# EAGLE board Design (EAGLE 9.3.1)
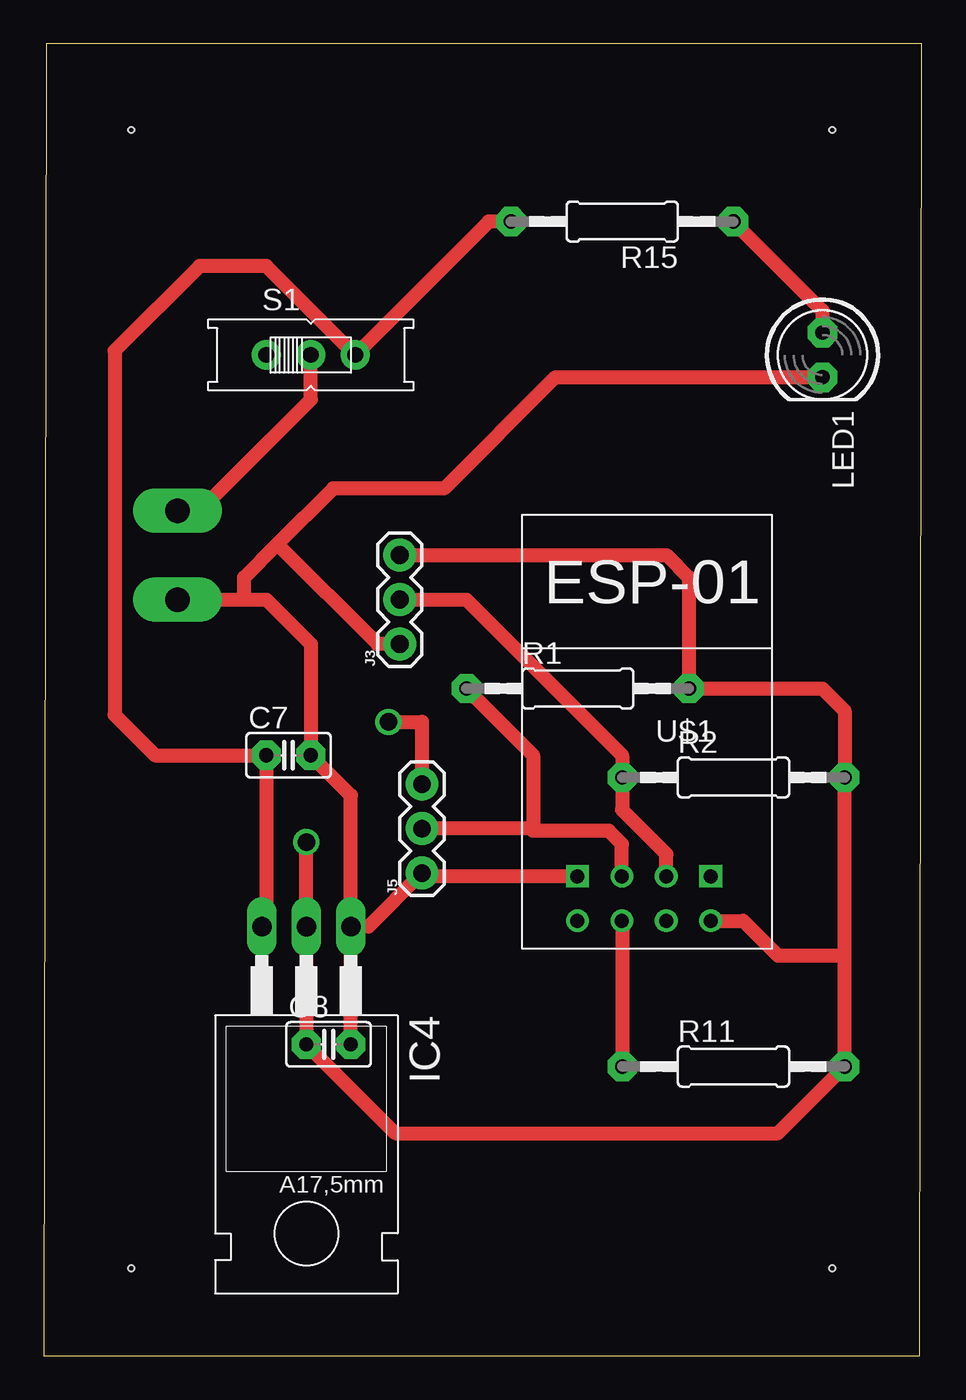
[diagram p0: board, top side]
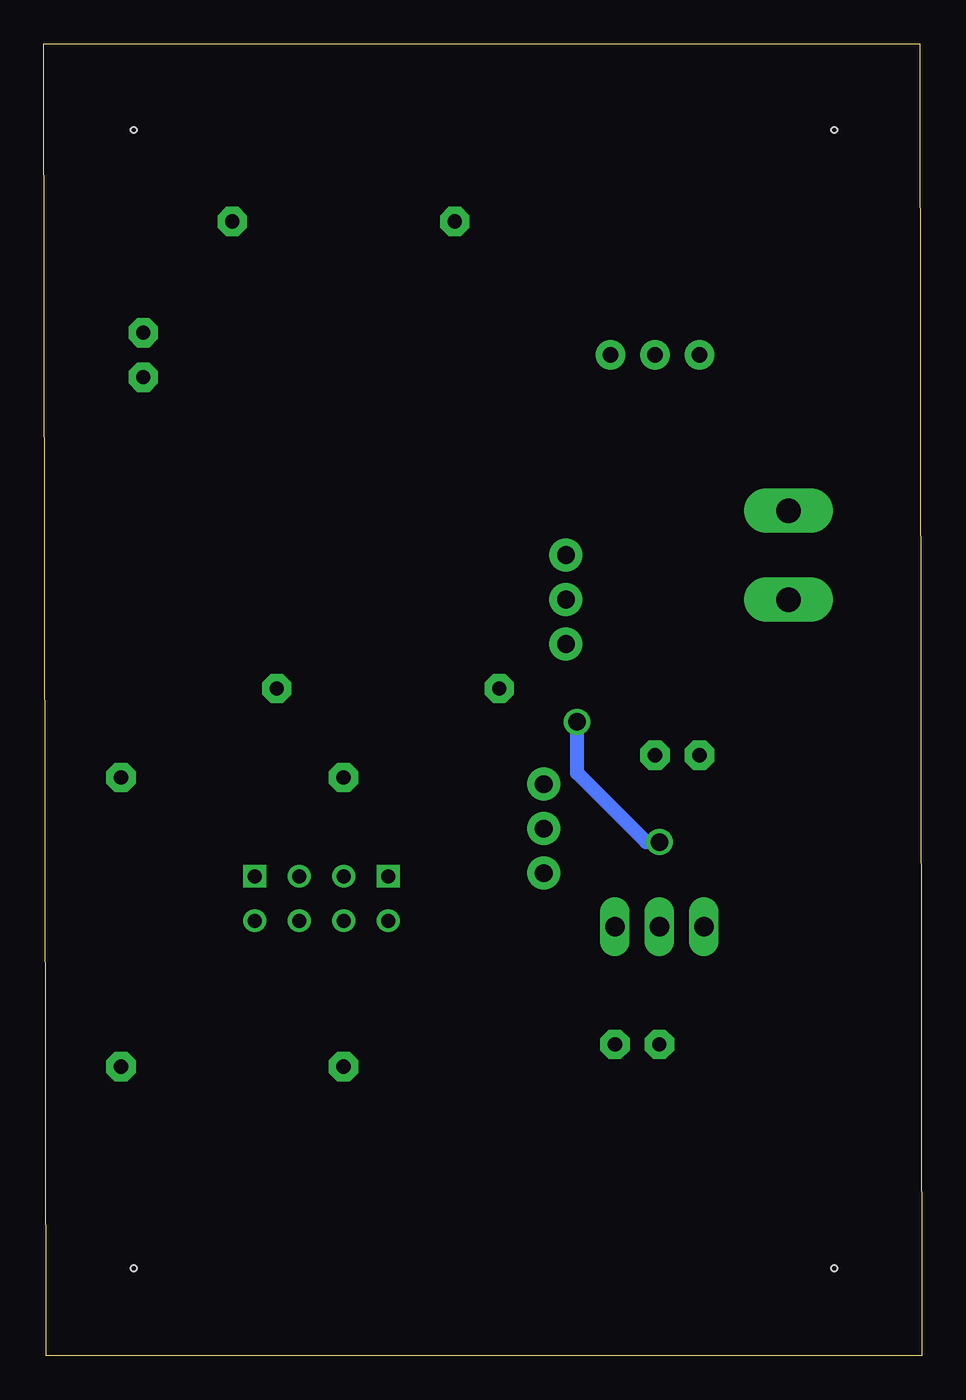
[diagram p1: board, bottom side, seen from below]

Size 50.13 x 74.92 mm. Coordinates in mm from the lower left corner, seen from the top.
Outline: 0,0 50,0 50.13,74.92 0.13,74.92 0,0
Copper layers (1*16): Top 0.035mm / dielectric 1.5mm / Bottom 0.035mm
Design rules "default": minimum track width 6mil, minimum drill 0.35mm, track to track 6mil, track to pad 6mil, pad to pad 6mil, via to via 6mil, smd to smd 6mil, copper to edge 40mil, drill to drill 6mil, minimum pad ring 10mil, minimum via ring 8mil, stop-mask expansion 4mil, vias tented up to drill 0mil, thermal gap 10mil
Holes 0.35 mm at 5,70 5,5 45,5 45,70

## Footprints (pad centres in the part's own frame; a part is rotated, then mirrored left to right if it is on the bottom)
C025-025X050 = drill 0.813 pad 1.676 octagon: 1 -1.27,0; 2 1.27,0
TO220 = drill 1.118 long: 1 -2.54,-6.35; 2 0,-6.35; 3 2.54,-6.35
1X03 = drill 1.016 pad 1.88: 1 0,0; 2 2.54,0; 3 5.08,0
1X1-BIGPOGO = drill 1.4 pad 2.54 long: P$1 0,0
LED5MM = drill 0.813 pad 1.676 octagon: A -1.27,0; K 1.27,0
0207/12 = drill 0.813 pad 1.676 octagon: 1 -6.35,0; 2 6.35,0
EG1218 = drill 0.9 pad 1.676: O -2.54,0; P 0,0; S 2.54,0
ESP01 = drill 0.8: CH_PD -1.285,-8.178; GPIO0 1.255,-5.638; GPIO2 -1.285,-5.638; RST 1.255,-8.178; TX -3.825,-8.178; VCC 3.795,-8.178 | drill 0.8 square: GND -3.825,-5.638; RX 3.795,-5.638

## Placement (x,y rotation side)
C7  10uF  [C025-025X050]  13.97,34.29 0 top
C8  10uF  [C025-025X050]  16.26,17.78 0 top
IC4  LM1117T-ADJ  [TO220]  14.99,18.16 180 top
J3  1x3 RA Female .1"  [1X03]  20.32,40.64 90 top
J5  1x3 RA Female .1"  [1X03]  21.59,27.56 90 top
JP1  5V_SUPPLY  [1X1-BIGPOGO]  7.62,48.26 0 top
JP2  GND  [1X1-BIGPOGO]  7.62,43.18 0 top
LED1  GREEN  [LED5MM]  44.45,57.15 270 top
R1  10k  [0207/12]  30.48,38.1 0 top
R2  10k  [0207/12]  39.37,33.02 0 top
R11  10k  [0207/12]  39.37,16.51 0 top
R15  470  [0207/12]  33.02,64.77 180 top
S1  SWITCH  [EG1218]  15.24,57.15 0 top
U$1  ESP01  [ESP01]  34.29,33.02 0 top

## Library data of the parts
C7 C8 JP1 JP2 LED1 R1 R2 R11 R15 S1 = adafruit
IC4 = lm1117
J3 J5 = SparkFun-Connectors
U$1 = esp8266modules

## Nets
+3V3: C8.1 IC4.2 J3.3 J5.3 R1.2 R2.2 R11.2 U$1.VCC
+5V: C7.1 IC4.3 R15.2 S1.S
GND: C7.2 C8.2 IC4.1 J3.1 J5.1 JP2.P$1 LED1.K U$1.GND
GPIO0: J3.2 R2.1 U$1.GPIO0
GPIO2: J5.2 R1.1 U$1.GPIO2
N$5: JP1.P$1 S1.P
N$6: R11.1 U$1.CH_PD
N$19: LED1.A R15.1

## Tracks (layer width: path | path; a pad name or v marks a point on that pad's centre or on a via)
+3V3  (via drill 1 pad 1.3)
  Top 0.813: 45.72,22.86 R11.2 41.91,12.7 20.07,12.7 C8.1 IC4.2 v14.99,29.34 | 45.72,22.86 R2.2 45.72,36.83 44.45,38.1 R1.2 36.83,44.45 35.56,45.72 J3.3 | U$1.VCC 39.93,24.84 41.91,22.86 45.72,22.86 | v19.68,36.2 21.59,36.2 J5.3
  Bottom 0.813: v14.99,29.34 15.75,29.34 19.68,33.27 v19.68,36.2
+5V
  Top 0.813: R15.2 25.4,64.77 S1.S 12.7,62.23 8.89,62.23 4.05,57.39 4.05,36.59 6.35,34.29 C7.1 12.7,24.77 IC4.3
GND
  Top 0.813: U$1.GND 21.77,27.38 J5.1 18.54,24.51 IC4.1 | J3.1 19.05,40.64 13.34,46.35 | LED1.K 29.21,55.88 22.86,49.53 16.51,49.53 13.34,46.35 | C8.2 IC4.1 | JP2.P$1 11.43,43.18 | 11.43,43.18 12.7,43.18 15.24,40.64 C7.2 17.53,32 IC4.1 | 11.43,43.18 11.43,44.45 13.34,46.35
GPIO0
  Top 0.813: U$1.GPIO0 35.55,28.65 33.02,31.18 R2.1 33.02,34.29 24.13,43.18 J3.2
GPIO2
  Top 0.813: U$1.GPIO2 33.01,29.2 33.02,29.21 32.26,29.97 27.94,29.97 27.94,30.1 | 27.94,30.1 J5.2 | R1.1 27.94,34.29 27.94,30.1
N$5
  Top 0.813: S1.P 15.24,54.61 8.89,48.26 JP1.P$1
N$6
  Top 0.813: U$1.CH_PD 33.02,24.83 R11.1
N$19
  Top 0.813: LED1.A 44.45,59.69 R15.1